# Altium PCB MAGI'sPrototypeBoard.PcbDoc (part 3 of 3)
Units mil, origin at the board's own origin, x right, y up, seen from the top; angles counter-clockwise.
Board outline 6000 x 4000 mil, 2 copper layers (Top Layer, Bottom Layer); 30 components, 124 nets, 1722 pads, 44 vias.
Unrouted connection lines stored in the file: 29.
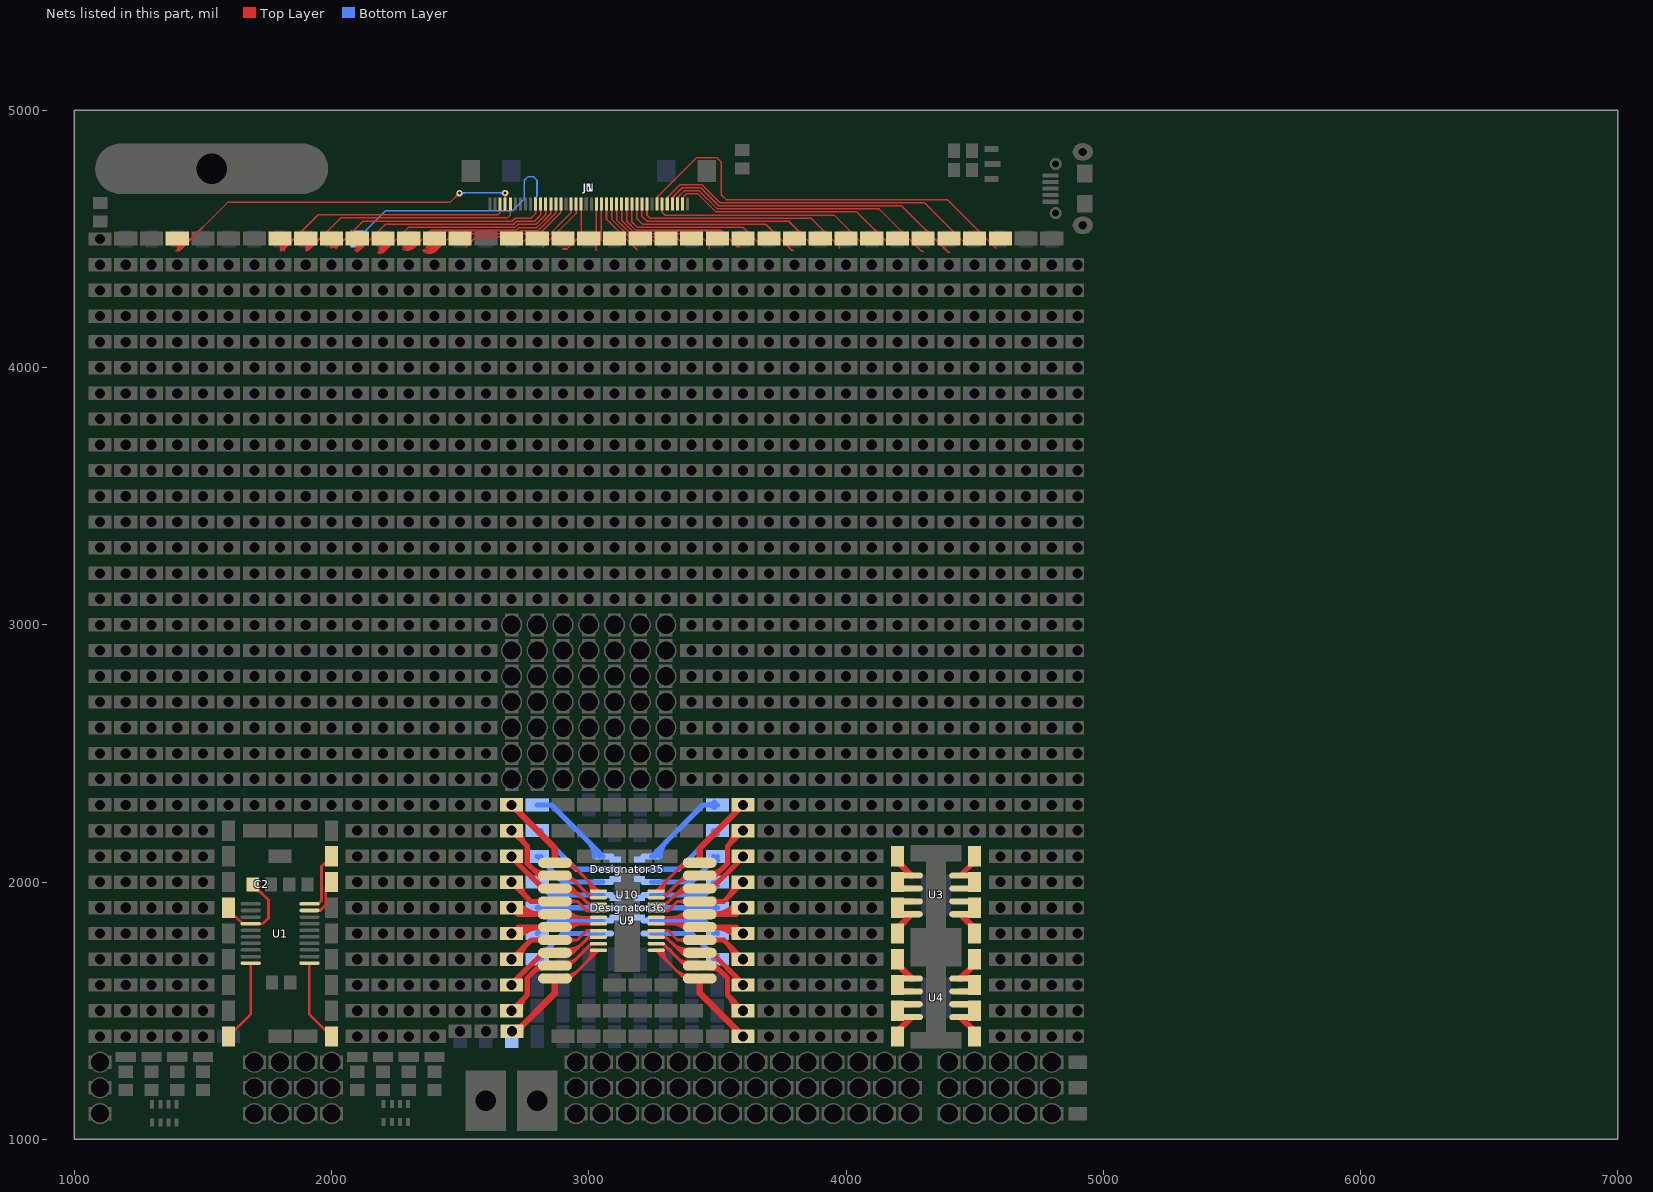
[diagram p3: the nets of this part, all layers, seen from the top]

## Via types
v1: diameter 35.43, hole 23.62, Top Layer to Bottom Layer, tented both sides, 12 vias
v2: diameter 31.5, hole 19.68, Top Layer to Bottom Layer, tented both sides, 9 vias
v3: diameter 24, hole 12, Top Layer to Bottom Layer, tented both sides, 6 vias
v4: diameter 39.37, hole 27.56, Top Layer to Bottom Layer, tented both sides, 6 vias
v5: diameter 59.06, hole 39.37, Top Layer to Bottom Layer, tented both sides, 5 vias
v6: diameter 47.24, hole 39.37, Top Layer to Bottom Layer, 3 vias
v7: diameter 47.24, hole 31.5, Top Layer to Bottom Layer, tented both sides, 3 vias

## Nets (pads, with @x,y where several pads share a name; then routed paths per layer and width w, separated by ;. In a path a pad name is that pad's centre, name@x,y a point inside that pad or via, vN(x,y) a via of type N, cw(c..) or ccw(c..) an arc to the next point about the centre after c; other vN are vias at no path point) (continued)
PA4: J1.19 pad.62@3000,4502 | length 262.3
  Top Layer w6: pad.62@3016.62,4485.38 ccw(c2985.44,4516.56) pad.62@3029.53,4516.56 ; pad.62@3020.86,4481.14 ccw(c2999.93,4502.07) pad.62@3029.53,4502.07 ; pad.62@3025.1,4476.9 ccw(c3014.42,4487.58) pad.62@3029.53,4487.58 ; 3027,4456 3029.53,4458.53 J1.19@3029.53,4636.02 ; J1.19@3027.47,4614.28 cw(c3022.51,4609.32) 3029.53,4609.32 cw(c3036.54,4609.32) J1.19@3031.58,4614.28 ; 3029.34,4472.66 ccw(c3028.9,4473.1) 3029.53,4473.1
PA5: J1.16 pad.62@3300,4502 | length 296.3
  Top Layer w6: J1.16@3086.53,4614.28 cw(c3081.57,4609.32) 3088.58,4609.32 cw(c3095.6,4609.32) J1.16@3090.64,4614.28 ; J1.16@3088.58,4636.02 3088.58,4577.53 3169.12,4497 3248.23,4497 3272.11,4473.11
PA6: J1.17 pad.62@3200,4502 | length 238.4
  Top Layer w6: J1.17@3066.84,4614.28 cw(c3061.88,4609.32) 3068.9,4609.32 cw(c3075.91,4609.32) J1.17@3070.95,4614.28 ; J1.17@3068.9,4636.02 3068.9,4577.1 3188,4458
PA7: J1.18 pad.62@3100,4502 | length 206.6
  Top Layer w6: J1.18@3047.16,4614.28 cw(c3042.2,4609.32) 3049.21,4609.32 cw(c3056.23,4609.32) J1.18@3051.27,4614.28 ; J1.18@3049.21,4636.02 3049.21,4496.01 3060.73,4484.5 pad.62@3100,4484.5
PA13: J1.27 pad.62@2400,4502 | length 1038.1
  Top Layer w6: 2355.43,4454 ccw(c2380.7,4481.21) 2406.95,4454.95 ; 2359.52,4458.4 ccw(c2384.94,4485.78) 2411.36,4459.36 ; 2363.6,4462.79 ccw(c2389.18,4490.34) 2415.76,4463.76 ; 2367.68,4467.19 ccw(c2393.42,4494.91) 2420.16,4468.16 ; 2371.76,4471.59 ccw(c2397.66,4499.48) 2424.57,4472.57 ; pad.62@2375.85,4475.98 ccw(c2401.9,4504.04) pad.62@2428.97,4476.97 ; pad.62@2379.93,4480.38 ccw(c2406.14,4508.61) pad.62@2433.37,4481.37 ; pad.62@2384.01,4484.78 ccw(c2410.38,4513.17) pad.62@2437.78,4485.78 ; 2407,4456 2407,4455 2473,4521 2722.88,4521 2734.38,4532.5 2803.59,4532.5 2872.05,4600.96 J1.27@2872.05,4636.02 ; J1.27@2869.99,4614.28 cw(c2865.03,4609.32) 2872.05,4609.32 cw(c2879.06,4609.32) J1.27@2874.1,4614.28
PA14: J1.28 pad.62@2300,4502 | length 969.4
  Top Layer w6: 2276.2,4460.89 ccw(c2294.67,4492.79) 2320.73,4466.73 ; 2279.21,4466.08 ccw(c2298.72,4499.78) 2326.25,4472.25 ; 2282.22,4471.28 ccw(c2302.77,4506.78) pad.62@2331.77,4477.77 ; pad.62@2285.22,4476.47 ccw(c2306.82,4513.77) pad.62@2337.29,4483.29 ; pad.62@2288.23,4481.66 ccw(c2310.86,4520.77) pad.62@2342.82,4488.82 ; pad.62@2291.23,4486.85 ccw(c2314.91,4527.77) 2348.34,4494.34 ; 2318,4464 2387,4533 2717.91,4533 2729.41,4544.5 2798.62,4544.5 2852.36,4598.25 J1.28@2852.36,4636.02 ; J1.28@2850.31,4614.28 cw(c2845.35,4609.32) 2852.36,4609.32 cw(c2859.38,4609.32) J1.28@2854.42,4614.28
PA15: J1.29 pad.62@2200,4502 | length 1102
  Top Layer w6: 2179.54,4446.13 ccw(c2188.18,4469.73) 2205.96,4451.96 ; 2181.61,4451.76 ccw(c2191.75,4479.46) 2212.6,4458.6 ; 2183.67,4457.4 ccw(c2195.31,4489.19) 2219.25,4465.25 ; 2185.73,4463.03 ccw(c2198.87,4498.92) 2225.89,4471.89 ; 2187.8,4468.66 ccw(c2202.43,4508.65) pad.62@2232.54,4478.54 ; 2189.86,4474.3 ccw(c2205.99,4518.37) pad.62@2239.18,4485.18 ; pad.62@2191.92,4479.93 ccw(c2209.56,4528.1) 2245.83,4491.83 ; pad.62@2193.98,4485.57 ccw(c2213.12,4537.83) 2252.48,4498.48 ; 2208,4454 2299,4545 2712.94,4545 2724.44,4556.5 2793.65,4556.5 2832.68,4595.53 J1.29@2832.68,4636.02 ; J1.29@2830.62,4614.28 cw(c2825.66,4609.32) 2832.68,4609.32 cw(c2839.69,4609.32) J1.29@2834.73,4614.28
PB0: J1.11 pad.62@3800,4502 | length 728
  Top Layer w6: J1.11@3184.95,4614.28 cw(c3179.99,4609.32) 3187.01,4609.32 cw(c3194.02,4609.32) J1.11@3189.06,4614.28 ; J1.11@3187.01,4636.02 3187.01,4578.99 3209,4557 3688.23,4557 3789.23,4456 3796,4456
PB1: J1.12 pad.62@3700,4502 | length 619.2
  Top Layer w6: J1.12@3165.27,4614.28 cw(c3160.31,4609.32) 3167.32,4609.32 cw(c3174.34,4609.32) J1.12@3169.38,4614.28 ; J1.12@3167.32,4636.02 3167.32,4566.68 3189,4545 3601,4545 pad.62@3669,4477
PB2: J1.37 pad.62@1400,4502 | length 1824.8
  Top Layer w6: 1394,4454 1408,4454 1596,4642 2461,4642 v3(2497,4678) ; 1400,4454.5 ccw(c1400,4475.02) 1414.51,4460.51 ; 1400,4460.5 ccw(c1400,4495.51) 1424.75,4470.75 ; 1400,4466.5 ccw(c1400,4515.99) pad.62@1435,4481 ; 1400,4472.5 ccw(c1400,4536.48) 1445.24,4491.24 ; pad.62@1400,4478.5 ccw(c1400,4556.96) 1455.48,4501.48 ; pad.62@1400,4484.5 ccw(c1400,4577.45) 1465.72,4511.72 ; v3@2488,4678 cw(c2466.27,4678) 2481.64,4662.64 cw(c2497,4647.27) v3@2497,4669 ; v3@2668.64,4672.64 cw(c2652.79,4656.79) J1.37@2675.2,4656.79 ; J1.37@2673.14,4657.76 ccw(c2668.18,4662.72) 2675.2,4662.72 ccw(c2682.21,4662.72) J1.37@2677.25,4657.76 ; J1.37@2675.2,4636.02 2675.2,4669.2 v3@2677,4671 ; J1.37@2675.2,4657.75 cw(c2696.25,4657.75) v3@2681.36,4672.64
  Bottom Layer w6: v3(2497,4678) 2498,4679 v3(2675,4679) ; v3@2503.36,4671.64 cw(c2521.14,4653.86) 2521.14,4679 ; v3@2503.36,4684.36 ccw(c2516.31,4697.31) 2516.31,4679 ; v3@2668.64,4672.64 ccw(c2653.27,4657.27) 2653.27,4679 ccw(c2653.27,4700.73) v3@2668.64,4685.36
PB3: J1.26 pad.62@2500,4502 | length 471.1
  Top Layer w6: 2524,4466 2524,4471 2562,4509 2727.85,4509 2739.35,4520.5 2808.56,4520.5 2891.73,4603.67 J1.26@2891.73,4636.02 ; J1.26@2889.68,4614.28 cw(c2884.72,4609.32) 2891.73,4609.32 cw(c2898.75,4609.32) J1.26@2893.79,4614.28
PB4: J1.30 pad.62@2100,4502 | length 1104
  Top Layer w6: 2090.1,4455.54 ccw(c2096.06,4483.53) 2116.3,4463.3 ; 2091.35,4461.41 ccw(c2098.81,4496.4) 2124.1,4471.1 ; 2092.6,4467.28 ccw(c2101.55,4509.27) pad.62@2131.91,4478.91 ; 2093.85,4473.15 ccw(c2104.3,4522.15) pad.62@2139.72,4486.72 ; pad.62@2095.1,4479.02 ccw(c2107.04,4535.02) 2147.53,4494.53 ; pad.62@2096.35,4484.88 ccw(c2109.78,4547.89) 2155.34,4502.34 ; 2100,4449 2116,4465 ; 2117,4464 2210,4557 2707.97,4557 2719.47,4568.5 2788.68,4568.5 2812.99,4592.82 J1.30@2812.99,4636.02 ; J1.30@2810.94,4614.28 cw(c2805.98,4609.32) 2812.99,4609.32 cw(c2820.01,4609.32) J1.30@2815.05,4614.28
PB6: J1.6 pad.62@4100,4502 | length 877.2
  Top Layer w6: J1.6@3283.38,4614.28 cw(c3278.42,4609.32) 3285.43,4609.32 cw(c3292.45,4609.32) J1.6@3287.49,4614.28 ; J1.6@3285.43,4636.02 3285.43,4602.57 3295,4593 3953,4593 pad.62@4067,4479
PB7: J1.13 pad.62@3600,4502 | length 557.2
  Top Layer w6: J1.13@3145.58,4614.28 cw(c3140.62,4609.32) 3147.64,4609.32 cw(c3154.65,4609.32) J1.13@3149.69,4614.28 ; J1.13@3147.64,4636.02 3147.64,4569.39 3184.03,4533 3513,4533 3576,4470 3586,4470
PB8: J1.2 pad.62@4200,4502 | length 909.9
  Top Layer w6: J1.2@3364.17,4636.02 3364.17,4660.56 3378.61,4675 3425,4675 3495,4605 4042,4605 pad.62@4164,4483
PB9: J1.3 pad.62@4300,4502 | length 1105.9
  Top Layer w6: J1.3@3344.49,4636.02 3344.49,4661.49 3370,4687 3429.97,4687 3499.97,4617 4128.23,4617 4292.23,4453 4301,4453 ; J1.3@3347.39,4655.71 cw(c3368.36,4655.71) 3353.54,4670.54
PB10: J1.38 pad.62@1800,4502 | length 1226.5
  Top Layer w6: 1800,4454.5 ccw(c1800,4476.88) 1815.83,4461.06 ; 1800,4460.5 ccw(c1800,4497.37) 1826.07,4471.3 ; 1800,4466.5 ccw(c1800,4517.86) pad.62@1836.31,4481.54 ; 1800,4472.5 ccw(c1800,4538.34) 1846.56,4491.78 ; pad.62@1800,4478.5 ccw(c1800,4558.83) 1856.8,4502.03 ; pad.62@1800,4484.5 ccw(c1800,4579.31) 1867.04,4512.27 ; 1817,4453 1817,4462.23 1948.77,4594 2647,4594 2655.51,4602.51 J1.38@2655.51,4636.02 ; J1.38@2653.46,4614.28 cw(c2648.5,4609.32) 2655.51,4609.32 cw(c2662.53,4609.32) J1.38@2657.57,4614.28
PB11: J1.36 pad.62@1900,4502 | length 1166.6
  Top Layer w6: 1899.56,4454.5 ccw(c1899.75,4475.62) 1914.69,4460.69 ; 1899.61,4460.5 ccw(c1899.94,4495.65) 1924.8,4470.8 ; 1899.67,4466.5 ccw(c1900.13,4515.68) pad.62@1934.9,4480.9 ; 1899.72,4472.5 ccw(c1900.31,4535.71) 1945.01,4491.01 ; pad.62@1899.78,4478.5 ccw(c1900.5,4555.74) 1955.12,4501.12 ; pad.62@1899.84,4484.5 ccw(c1900.69,4575.77) 1965.23,4511.23 ; 1905,4461 1915,4461 2036,4582 2684,4582 2694.88,4592.88 J1.36@2694.88,4636.02 ; J1.36@2692.83,4614.28 cw(c2687.87,4609.32) 2694.88,4609.32 cw(c2701.9,4609.32) J1.36@2696.94,4614.28
PB12: J1.4 pad.62@4400,4502 | length 1238.9
  Top Layer w6: J1.4@3324.8,4636.02 3324.8,4660.8 3363,4699 3434.94,4699 3504.94,4629 4216.23,4629 4397.23,4448 4404,4448 ; J1.4@3327.71,4655.71 cw(c3347.03,4655.71) 3333.37,4669.37
PB13: J1.5 pad.62@4500,4502 | length 1330.4
  Top Layer w6: J1.5@3305.12,4636.02 3305.12,4661.12 3355,4711 3439.91,4711 3509.91,4641 4305,4641 4474,4472 4474,4471 ; J1.5@3308.02,4655.71 cw(c3328.1,4655.71) 3313.9,4669.9
PB14: J1.7 pad.62@4600,4502 | length 1663.5
  Top Layer w6: J1.7@3262.65,4655.71 cw(c3271.66,4655.71) 3265.29,4662.08 ; J1.7@3263.74,4657.8 ccw(c3259.19,4662.53) 3265.75,4662.53 ; J1.7@3265.75,4636.02 3265.75,4662.53 ; J1.7@3267.76,4657.8 cw(c3272.31,4662.53) 3265.75,4662.53 ; J1.7@3268.65,4655.71 cw(c3292.14,4655.71) 3275.53,4672.32 ; 4582,4464 4582,4465 4394,4653 3534,4653 3515,4672 3515,4799.1 3497.82,4816.28 3419.5,4816.28 3265.75,4662.53
PB15: J1.9 pad.62@4000,4502 | length 858.6
  Top Layer w6: J1.9@3224.32,4614.28 cw(c3219.36,4609.32) 3226.38,4609.32 cw(c3233.39,4609.32) J1.9@3228.43,4614.28 ; J1.9@3226.38,4636.02 3226.38,4592.62 3238,4581 3864.23,4581 3974,4471.23 3974,4465
PC0: J1.24 pad.62@2700,4502 | length 298.3
  Top Layer w6: pad.62@2730,4476 2730.77,4476 2751.27,4496.5 2825.5,4496.5 2931.1,4602.1 J1.24@2931.1,4636.02 ; J1.24@2929.05,4614.28 cw(c2924.09,4609.32) 2931.1,4609.32 cw(c2938.12,4609.32) J1.24@2933.16,4614.28
PC1: J1.23 pad.62@2800,4502 | length 231.8
  Top Layer w6: 2821,4469 2950.79,4598.79 J1.23@2950.79,4636.02 ; J1.23@2948.73,4614.28 cw(c2943.77,4609.32) 2950.79,4609.32 cw(c2957.8,4609.32) J1.23@2952.84,4614.28
PC2: J1.22 pad.62@2900,4502 | length 226
  Top Layer w6: 2898,4461 2915,4461 2970.47,4516.47 J1.22@2970.47,4636.02 ; J1.22@2968.42,4614.28 cw(c2963.46,4609.32) 2970.47,4609.32 cw(c2977.49,4609.32) J1.22@2972.53,4614.28
PC3: J1.31 pad.62@2000,4502 | length 1096.2
  Top Layer w6: 1996.44,4466.68 ccw(c2000.93,4511.18) pad.62@2032.55,4479.55 ; 1997.04,4472.65 ccw(c2002.56,4527.43) pad.62@2041.5,4488.5 ; pad.62@1997.64,4478.62 ccw(c2004.2,4543.68) 2050.44,4497.44 ; pad.62@1998.25,4484.59 ccw(c2005.84,4559.93) 2059.39,4506.39 ; 2016,4464 2027,4475 2027,4474 2122,4569 2703,4569 2714.5,4580.5 2775,4580.5 2793.31,4598.81 J1.31@2793.31,4636.02 ; J1.31@2791.25,4614.28 cw(c2786.29,4609.32) 2793.31,4609.32 cw(c2800.32,4609.32) J1.31@2795.36,4614.28
PC4: J1.15 pad.62@3400,4502 | length 371.6
  Top Layer w6: J1.15@3106.21,4614.28 cw(c3101.25,4609.32) 3108.27,4609.32 cw(c3115.28,4609.32) J1.15@3110.32,4614.28 ; J1.15@3108.27,4636.02 3108.27,4574.82 3174.09,4509 3338,4509 pad.62@3368,4479
PC5: J1.10 pad.62@3900,4502 | length 768.3
  Top Layer w6: J1.10@3204.64,4614.28 cw(c3199.68,4609.32) 3206.69,4609.32 cw(c3213.71,4609.32) J1.10@3208.75,4614.28 ; J1.10@3206.69,4636.02 3206.69,4588.81 3226.5,4569 3777,4569 pad.62@3870,4476
PC7: J1.14 pad.62@3500,4502 | length 471.4
  Top Layer w6: J1.14@3125.9,4614.28 cw(c3120.94,4609.32) 3127.95,4609.32 cw(c3134.97,4609.32) J1.14@3130.01,4614.28 ; J1.14@3127.95,4636.02 3127.95,4572.11 3179.06,4521 3425,4521 3469,4477 3469,4461
RST: C2.2 JN.2 pad.34 pad.62@2100,4500 U1.4 | length 1548.3
  Top Layer w6: pad.34@1600,1894.85 pad.34@1600,1900
  Top Layer w10: pad.34@1600,1894.85 1600,1892.02 1653.64,1838.39 U1.4@1685.83,1838.39 1733.39,1838.39 1755,1860 1755,1929.65 C2.2@1693.7,1990.94 ; C2.2@1693.7,1968.39 cw(c1693.7,1913.92) 1732.21,1952.43 ; C2.2@1693.7,1978.39 cw(c1693.7,1948.07) C2.2@1715.14,1969.51 ; C2.2@1712.32,1987.01 ccw(c1747.78,1987.01) 1722.71,1961.94
  Bottom Layer w6: pad.62@2100,4500 2210.5,4610.5 2704.5,4610.5 2749.25,4655.25 2749.25,4728.25 2763.75,4742.75 2784.25,4742.75 2798.75,4728.25 2798.75,4666.75 ; pad.62@2100,4511 ccw(c2100,4537.56) 2118.78,4518.78 ccw(c2137.56,4500) pad.62@2111,4500 ; pad.62@2100,4517 ccw(c2100,4558.04) 2129.02,4529.02 ccw(c2158.04,4500) pad.62@2117,4500 ; pad.62@2123,4500 cw(c2178.53,4500) 2139.26,4539.26 ; JN.2@2793.31,4636.02 2793.31,4661.31 2798.75,4666.75 ; JN.2@2796.1,4656.51 cw(c2806.11,4659.38) 2798.75,4666.75
SCK: pad.47 U1.11 | length 358.3
  Top Layer w10: U1.11@1914.17,1684.84 1914.17,1485.83 pad.47@2000,1400 ; 1965.86,1434.14 ccw(c2000,1468.28) pad.47@2000,1420
SS: pad.39 U1.10 | length 320.4
  Top Layer w10: pad.39@1600,1400 1685.83,1485.83 U1.10@1685.83,1684.84
SWCLK: pad.40@2000,2100 U1.20 | length 284.7
  Top Layer w10: U1.20@1914.17,1915.16 1948.16,1915.16 1961,1928 1961,2061 pad.40@2000,2100 ; U1.20@1946.65,1917.05 ccw(c1946.65,1925.24) 1952.45,1919.45 ; 1965.86,2065.86 cw(c2000,2031.72) pad.40@2000,2080
SWDIO: pad.41 U1.19 | length 193.2
  Top Layer w10: U1.19@1914.17,1889.57 1956.57,1889.57 1977,1910 1977,1977 pad.41@2000,2000 ; U1.19@1946.65,1891.46 ccw(c1946.65,1919.95) 1966.8,1899.8
U3-1: pad.59 U3.1 | length 98
  Top Layer w25: pad.59@4200,2100 4200,2080.51 U3.1@4255.51,2025
U3-2: pad.58 U3.2 | length 65.9
  Top Layer w25: pad.58@4200,2000 4225,1975 U3.2@4255.51,1975
U3-3: pad.57 U3.3 | length 65.9
  Top Layer w25: pad.57@4200,1900 4225,1925 U3.3@4255.51,1925
U3-4: pad.56 U3.4 | length 98
  Top Layer w25: pad.56@4200,1800 4200,1819.49 U3.4@4255.51,1875
U3-5: pad.63@4500,1800 U3.5 | length 98
  Top Layer w25: U3.5@4444.49,1875 4500,1819.49 pad.63@4500,1800
U3-6: pad.62@4500,1900 U3.6 | length 93.3
  Top Layer w20: U3.6@4444.49,1925 U3.6@4475,1925 ; pad.62@4499.74,1915 cw(c4499.16,1949.16) pad.62@4475,1925 ; pad.62@4500,1900 U3.6@4475,1925
U3-7: pad.61 U3.7 | length 93.3
  Top Layer w20: U3.7@4444.49,1975 pad.61@4475,1975 ; pad.61@4499.74,1985 ccw(c4499.16,1950.85) pad.61@4475,1975 ; pad.61@4500,2000 pad.61@4475,1975
U3-8: pad.60 U3.8 | length 125.5
  Top Layer w20: U3.8@4444.49,2025 4500,2080.51 pad.60@4500,2100 ; pad.60@4494.76,2075.27 ccw(c4470.02,2100) pad.60@4505,2100
U4-1: pad.55 U4.1 | length 78.5
  Top Layer w25: pad.55@4200,1680.51 U4.1@4255.51,1625
U4-2: pad.54 U4.2 | length 65.9
  Top Layer w25: pad.54@4200,1600 4225,1575 U4.2@4255.51,1575
U4-3: pad.53 U4.3 | length 65.9
  Top Layer w25: pad.53@4200,1500 4225,1525 U4.3@4255.51,1525
U4-4: pad.52 U4.4 | length 98
  Top Layer w25: pad.52@4200,1400 4200,1419.49 U4.4@4255.51,1475
U4-5: pad.51 U4.5 | length 78.5
  Top Layer w25: U4.5@4444.49,1475 pad.51@4500,1419.49
U4-6: pad.50 U4.6 | length 89.6
  Top Layer w25: U4.6@4444.49,1525 4475,1525 pad.50@4500,1500 ; pad.50@4478.66,1521.34 ccw(c4500,1542.67) pad.50@4500,1512.5
U4-7: pad.49 U4.7 | length 89.6
  Top Layer w25: U4.7@4444.49,1575 4475,1575 pad.49@4500,1600 ; pad.49@4478.66,1578.66 cw(c4500,1557.32) pad.49@4500,1587.5
U4-8: pad.48 U4.8 | length 98
  Top Layer w25: U4.8@4444.49,1625 4500,1680.51 pad.48@4500,1700
U7-1: Designator35.3 pad.64@2700,2300 pad.73@2800,2300 U7.1 U9.1 U10.14 | length 1103.5
  Top Layer w12: U7.1@2868.5,2075 2927.95,2075 U9.1@3037.8,1965.16 ; U7.1@2914.76,2061.32 cw(c2914.76,1996.44) 2960.64,2042.31 ; U7.1@2914.76,2073.32 cw(c2914.76,2037.41) 2940.16,2062.8 ; 2990.91,2012.04 cw(c2944.03,1965.16) U9.1@3010.33,1965.16 ; 3011.4,1991.56 cw(c2985,1965.16) U9.1@3022.33,1965.16 ; U9.1@3031.88,1971.07 cw(c3025.97,1965.16) U9.1@3034.33,1965.16
  Top Layer w25: pad.64@2700,2300 2868.5,2131.5 U7.1@2868.5,2075
  Bottom Layer w20: pad.73@2800,2300 2855.51,2300 U10.14@3055.51,2100 ; 2998.65,2156.86 cw(c2941.79,2100) U10.14@3022.2,2100 ; 3032.8,2122.72 cw(c3010.08,2100) U10.14@3042.2,2100
U7-2: Designator35.2 pad.64@2700,2200 pad.74@2800,2200 U7.2 U9.2 U10.13 | length 1036.5
  Top Layer w12: U7.2@2868.5,2025 2924.66,2025 3010.1,1939.57 U9.2@3037.8,1939.57 ; U7.2@2914.76,2011.32 cw(c2914.76,1954.38) 2955.03,1994.64 ; U7.2@2914.76,2023.32 cw(c2914.76,1995.35) 2934.54,2015.12
  Top Layer w20: pad.64@2700,2200 2761,2139 2761,2072.55 2808.55,2025 U7.2@2868.5,2025 ; pad.64@2715,2200 ccw(c2751.21,2200) pad.64@2725.61,2174.39 ; pad.64@2735,2200 ccw(c2819.5,2200) 2759.75,2140.25 ; 2782.33,2051.22 ccw(c2822.24,2091.13) U7.2@2822.24,2034.69
  Bottom Layer w20: pad.74@2800,2200 2950,2050 U10.13@3055.51,2050 ; pad.74@2815,2200 ccw(c2851.21,2200) 2825.61,2174.39
U7-3: Designator35.1 pad.64@2700,2100 pad.75@2800,2100 U7.3 U9.3 U10.12 | length 979.3
  Top Layer w12: U7.3@2868.5,1975 2939,1975 ; U7.3@2914.76,1961.32 cw(c2914.76,1869.77) 2979.5,1934.5 ; U7.3@2914.76,1973.32 cw(c2914.76,1910.74) 2959.01,1954.99 ; U7.3@2914.76,1985.32 cw(c2914.76,1951.71) 2938.53,1975.47 ; U7.3@2926.48,1967.93 cw(c2939,1960.38) 2939,1975 ; U7.3@2926.48,1982.07 ccw(c2939,1989.62) 2939,1975 ; 2990.59,1923.41 ccw(c3011.22,1944.05) U9.3@3011.22,1914.87 ; U9.3@3037.8,1913.98 3000.02,1913.98 2939,1975
  Top Layer w20: pad.64@2700,2100 2700,2096.78 2821.78,1975 U7.3@2868.5,1975 ; 2804.92,1991.86 ccw(c2822.24,2009.19) U7.3@2822.24,1984.69 ; 2806.04,1990.74 cw(c2790.3,1975) U7.3@2812.56,1975
  Bottom Layer w20: pad.75@2800,2100 2900,2000 U10.12@3055.51,2000 ; pad.75@2815,2100 ccw(c2851.21,2100) 2825.61,2074.39
U7-4: Designator36.3 pad.64@2700,2000 pad.76@2800,2000 U7.4 U9.4 U10.11 | length 843.7
  Top Layer w12: U7.4@2868.5,1925 2955,1925 2991.61,1888.39 U9.4@3037.8,1888.39 ; U7.4@2924.44,1915.32 cw(c2947.8,1891.96) 2947.8,1925 cw(c2947.8,1958.04) U7.4@2924.44,1934.68
  Top Layer w20: pad.64@2700,2000 2775,1925 U7.4@2868.5,1925 ; pad.64@2715,2000 ccw(c2751.21,2000) pad.64@2725.61,1974.39 ; pad.64@2735,2000 ccw(c2819.5,2000) 2759.75,1940.25 ; U7.4@2815.4,1918.15 ccw(c2798.86,1901.62) 2798.86,1925 ccw(c2798.86,1948.38) U7.4@2815.4,1931.85
  Bottom Layer w20: pad.76@2800,2000 2850,1950 U10.11@3055.51,1950
U7-5: Designator36.2 pad.64@2700,1900 pad.77@2800,1900 U7.5 U9.5 U10.10 | length 896.9
  Top Layer w12: U7.5@2868.5,1875 2880.71,1862.8 U9.5@3037.8,1862.8 ; U7.5@2915.96,1876.19 ccw(c2948.3,1908.53) 2948.3,1862.8 ; U7.5@2924.44,1884.68 ccw(c2977.27,1937.5) 2977.27,1862.8
  Top Layer w20: pad.64@2700,1900 2725,1875 U7.5@2868.5,1875 ; pad.64@2716.17,1897.17 ccw(c2769.7,1950.7) 2769.7,1875 ; pad.64@2730.31,1911.31 ccw(c2817.98,1998.98) U7.5@2817.98,1875 ; U7.5@2815.4,1868.15 ccw(c2798.86,1851.62) 2798.86,1875 ccw(c2798.86,1898.38) U7.5@2815.4,1881.85
  Bottom Layer w20: pad.77@2800,1900 U10.10@3055.51,1900
U7-6: Designator36.1 pad.64@2700,1800 pad.78@2800,1800 U7.6 U9.6 U10.9 | length 865
  Top Layer w12: U7.6@2880.71,1837.2 U9.6@3037.8,1837.2 ; U7.6@2915.96,1823.81 cw(c2948.3,1791.47) 2948.3,1837.2 ; U7.6@2924.44,1815.32 cw(c2977.27,1762.5) 2977.27,1837.2
  Top Layer w20: pad.64@2716.17,1802.83 cw(c2769.7,1749.3) 2769.7,1825 ; pad.64@2725,1825 U7.6@2868.5,1825 ; pad.64@2730.31,1788.69 cw(c2817.98,1701.02) U7.6@2817.98,1825 ; U7.6@2815.4,1818.15 ccw(c2798.86,1801.62) 2798.86,1825 ccw(c2798.86,1848.38) U7.6@2815.4,1831.85
  Bottom Layer w20: pad.78@2800,1800 2850,1850 U10.9@3055.51,1850
U7-7: pad.64@2700,1700 pad.79@2800,1700 U7.7 U9.7 U10.8 | length 892.8
  Top Layer w12: U7.7@2868.5,1775 2955,1775 2991.61,1811.61 U9.7@3037.8,1811.61 ; U7.7@2924.44,1765.32 cw(c2947.8,1741.96) 2947.8,1775 cw(c2947.8,1808.04) U7.7@2924.44,1784.68
  Top Layer w20: pad.64@2700,1700 2775,1775 U7.7@2868.5,1775 ; pad.64@2715,1700 cw(c2751.21,1700) pad.64@2725.61,1725.61 ; pad.64@2735,1700 cw(c2819.5,1700) 2759.75,1759.75 ; U7.7@2815.4,1768.15 ccw(c2798.86,1751.62) 2798.86,1775 ccw(c2798.86,1798.38) U7.7@2815.4,1781.85
  Bottom Layer w20: pad.79@2800,1700 2900,1800 U10.8@3055.51,1800 ; pad.79@2815,1700 cw(c2851.21,1700) 2825.61,1725.61
U7-8: pad.64@2700,1600 U7.8 U9.8 | length 603.9
  Top Layer w12: U7.8@2868.5,1725 2939,1725 ; U7.8@2914.76,1714.69 ccw(c2914.76,1748.29) 2938.53,1724.53 ; U7.8@2914.76,1726.69 ccw(c2914.76,1789.26) 2959.01,1745.01 ; U7.8@2914.76,1738.69 ccw(c2914.76,1830.23) 2979.5,1765.5 ; U7.8@2926.48,1717.93 cw(c2939,1710.38) 2939,1725 ; U7.8@2926.48,1732.07 ccw(c2939,1739.62) 2939,1725 ; 2990.59,1776.59 cw(c3011.22,1755.95) U9.8@3011.22,1785.13 ; U9.8@3037.8,1786.02 3000.02,1786.02 2939,1725
  Top Layer w20: pad.64@2700,1603.22 U7.8@2821.78,1725 ; 2804.92,1708.14 cw(c2822.24,1690.81) U7.8@2822.24,1715.32 ; 2806.04,1709.26 ccw(c2790.3,1725) U7.8@2812.56,1725
U7-9: pad.64@2700,1500 U7.9 U9.9 | length 634.3
  Top Layer w12: U7.9@2914.76,1676.69 ccw(c2914.76,1704.65) 2934.54,1684.88 ; U7.9@2914.76,1688.69 ccw(c2914.76,1745.62) 2955.03,1705.36 ; U7.9@2924.66,1675 3010.1,1760.43 U9.9@3037.8,1760.43
  Top Layer w20: pad.64@2700,1500 2761,1561 2761,1627.45 2808.55,1675 U7.9@2868.5,1675 ; pad.64@2715,1500 cw(c2751.21,1500) pad.64@2725.61,1525.61 ; pad.64@2735,1500 cw(c2819.5,1500) 2759.75,1559.75 ; 2782.33,1648.78 cw(c2822.24,1608.87) U7.9@2822.24,1665.32
U7-10: pad.64@2701,1420 pad.118@2700,1400 U7.10 U9.10 | length 643
  Top Layer w12: U7.10@2914.76,1626.69 ccw(c2914.76,1662.59) 2940.16,1637.2 ; U7.10@2914.76,1638.69 ccw(c2914.76,1703.56) 2960.64,1657.69 ; U7.10@2927.95,1625 U9.10@3037.8,1734.84 ; 2990.91,1687.96 ccw(c2944.03,1734.84) U9.10@3010.33,1734.84 ; 3011.4,1708.44 ccw(c2985,1734.84) U9.10@3022.33,1734.84 ; U9.10@3031.88,1728.93 ccw(c3025.97,1734.84) U9.10@3034.33,1734.84
  Top Layer w25: pad.64@2718,1418 2868.5,1568.5 U7.10@2868.5,1625 ; pad.64@2720,1433.5 ccw(c2720,1466.09) 2743.05,1443.05 ccw(c2766.09,1420) pad.64@2733.5,1420
U7-11: pad.75@3600,1400 U7.11 U9.11 | length 617.3
  Top Layer w12: U9.11@3262.2,1734.84 U7.11@3372.05,1625 ; U9.11@3265.67,1734.84 ccw(c3274.03,1734.84) U9.11@3268.12,1728.93 ; U9.11@3277.67,1734.84 ccw(c3315,1734.84) 3288.6,1708.44 ; U9.11@3289.67,1734.84 ccw(c3355.97,1734.84) 3309.09,1687.96 ; 3339.36,1657.69 ccw(c3385.24,1703.56) U7.11@3385.24,1638.69 ; 3359.85,1637.2 ccw(c3385.24,1662.59) U7.11@3385.24,1626.69
  Top Layer w25: U7.11@3431.5,1625 3431.5,1568.5 pad.75@3600,1400
U7-12: pad.74@3600,1500 U7.12 U9.12 | length 634.3
  Top Layer w12: U9.12@3262.2,1760.43 3289.9,1760.43 U7.12@3375.34,1675 ; 3344.97,1705.36 ccw(c3385.24,1745.62) U7.12@3385.24,1688.69 ; 3365.46,1684.88 ccw(c3385.24,1704.65) U7.12@3385.24,1676.69
  Top Layer w20: U7.12@3431.5,1675 3491.45,1675 3539,1627.45 3539,1561 pad.74@3600,1500 ; U7.12@3477.76,1665.32 cw(c3477.76,1608.87) 3517.67,1648.78 ; 3540.25,1559.75 cw(c3480.5,1500) pad.74@3565,1500 ; pad.74@3574.39,1525.61 cw(c3548.78,1500) pad.74@3585,1500
U7-13: pad.73@3600,1600 U7.13 U9.13 | length 603.9
  Top Layer w12: U9.13@3262.2,1786.02 3299.98,1786.02 3361,1725 ; U9.13@3288.78,1785.13 cw(c3288.78,1755.95) 3309.41,1776.59 ; 3320.5,1765.5 ccw(c3385.24,1830.23) U7.13@3385.24,1738.69 ; 3340.99,1745.01 ccw(c3385.24,1789.26) U7.13@3385.24,1726.69 ; 3361.47,1724.53 ccw(c3385.24,1748.29) U7.13@3385.24,1714.69 ; U7.13@3373.52,1717.93 ccw(c3361,1710.39) 3361,1725 ; U7.13@3373.52,1732.07 cw(c3361,1739.62) 3361,1725 ; U7.13@3431.5,1725 3361,1725
  Top Layer w20: U7.13@3477.76,1715.32 cw(c3477.76,1690.81) 3495.09,1708.14 ; U7.13@3478.22,1725 pad.73@3600,1603.22 ; U7.13@3487.44,1725 ccw(c3509.7,1725) 3493.96,1709.26
U7-14: pad.72@3600,1700 pad.80 U7.14 U9.14 U10.7 | length 921.3
  Top Layer w12: U9.14@3262.2,1811.61 3308.39,1811.61 3345,1775 U7.14@3431.5,1775 ; U7.14@3375.56,1765.32 ccw(c3352.2,1741.96) 3352.2,1775 ccw(c3352.2,1808.04) U7.14@3375.56,1784.68
  Top Layer w20: U7.14@3431.5,1775 3525,1775 pad.72@3600,1700 ; U7.14@3484.6,1768.15 cw(c3501.14,1751.62) 3501.14,1775 cw(c3501.14,1798.38) U7.14@3484.6,1781.85 ; 3540.25,1759.75 cw(c3480.5,1700) pad.72@3565,1700 ; pad.72@3574.39,1725.61 cw(c3548.78,1700) pad.72@3585,1700
  Bottom Layer w20: U10.7@3244.49,1800 3400,1800 pad.80@3500,1700 ; pad.80@3485,1700 ccw(c3448.79,1700) 3474.39,1725.61 ccw(c3500,1751.21) pad.80@3500,1715
U7-15: Designator36.6 pad.70@3600,1800 pad.81 U7.15 U9.15 U10.6 | length 921.9
  Top Layer w12: U9.15@3262.2,1837.2 U7.15@3419.29,1837.2 ; 3322.73,1837.2 cw(c3322.73,1762.5) U7.15@3375.56,1815.32 ; 3351.7,1837.2 cw(c3351.7,1791.47) U7.15@3384.04,1823.81
  Top Layer w20: U7.15@3431.5,1825 pad.70@3575,1825 ; U7.15@3482.02,1825 cw(c3482.02,1701.02) pad.70@3569.69,1788.69 ; U7.15@3484.6,1818.15 cw(c3501.14,1801.62) 3501.14,1825 cw(c3501.14,1848.38) U7.15@3484.6,1831.85 ; 3530.3,1825 cw(c3530.3,1749.3) pad.70@3583.83,1802.83
  Bottom Layer w20: U10.6@3244.49,1850 3450,1850 pad.81@3500,1800 ; pad.81@3485,1800 ccw(c3448.79,1800) 3474.39,1825.61 ccw(c3500,1851.21) pad.81@3500,1815
U7-16: Designator36.5 pad.69@3600,1900 pad.82 U7.16 U9.16 U10.5 | length 901.1
  Top Layer w12: U9.16@3262.2,1862.8 U7.16@3419.29,1862.8 ; 3322.73,1862.8 ccw(c3322.73,1937.5) U7.16@3375.56,1884.68 ; 3351.7,1862.8 ccw(c3351.7,1908.53) U7.16@3384.04,1876.19
  Top Layer w20: U7.16@3431.5,1875 pad.69@3575,1875 ; U7.16@3482.02,1875 ccw(c3482.02,1998.98) pad.69@3569.69,1911.31 ; U7.16@3484.6,1868.15 cw(c3501.14,1851.62) 3501.14,1875 cw(c3501.14,1898.38) U7.16@3484.6,1881.85 ; 3530.3,1875 ccw(c3530.3,1950.7) pad.69@3583.83,1897.17
  Bottom Layer w20: U10.5@3244.49,1900 pad.82@3500,1900 ; pad.82@3489.39,1889.39 ccw(c3463.79,1863.79) 3463.79,1900 ccw(c3463.79,1936.21) pad.82@3489.39,1910.61
U7-17: Designator36.4 pad.68@3600,2000 pad.83 U7.17 U9.17 U10.4 | length 900.6
  Top Layer w12: U9.17@3262.2,1888.39 3308.39,1888.39 3345,1925 U7.17@3431.5,1925 ; U7.17@3375.56,1915.32 ccw(c3352.2,1891.96) 3352.2,1925 ccw(c3352.2,1958.04) U7.17@3375.56,1934.68
  Top Layer w20: U7.17@3431.5,1925 3525,1925 pad.68@3600,2000 ; U7.17@3484.6,1918.15 cw(c3501.14,1901.62) 3501.14,1925 cw(c3501.14,1948.38) U7.17@3484.6,1931.85 ; 3540.25,1940.25 ccw(c3480.5,2000) pad.68@3565,2000 ; pad.68@3574.39,1974.39 ccw(c3548.79,2000) pad.68@3585,2000
  Bottom Layer w20: U10.4@3244.49,1950 3450,1950 pad.83@3500,2000 ; pad.83@3485,2000 cw(c3448.79,2000) 3474.39,1974.39 cw(c3500,1948.79) pad.83@3500,1985
U7-18: Designator35.6 pad.67@3600,2100 pad.84 U7.18 U9.18 U10.3 | length 957.8
  Top Layer w12: U9.18@3262.2,1913.98 3299.98,1913.98 3361,1975 ; U9.18@3288.78,1914.87 ccw(c3288.78,1944.05) 3309.41,1923.41 ; 3320.5,1934.5 cw(c3385.24,1869.77) U7.18@3385.24,1961.32 ; 3340.99,1954.99 cw(c3385.24,1910.74) U7.18@3385.24,1973.32 ; 3361.47,1975.47 cw(c3385.24,1951.71) U7.18@3385.24,1985.32 ; U7.18@3373.52,1967.93 ccw(c3361,1960.38) 3361,1975 ; U7.18@3373.52,1982.07 cw(c3361,1989.62) 3361,1975 ; U7.18@3431.5,1975 3361,1975
  Top Layer w20: U7.18@3477.76,1984.69 ccw(c3477.76,2009.19) 3495.09,1991.86 ; U7.18@3478.22,1975 pad.67@3600,2096.78 ; U7.18@3487.44,1975 cw(c3509.7,1975) 3493.96,1990.74
  Bottom Layer w20: U10.3@3244.49,2000 3400,2000 pad.84@3500,2100 ; pad.84@3485,2100 cw(c3448.79,2100) 3474.39,2074.39 cw(c3500,2048.79) pad.84@3500,2085
U7-19: Designator35.5 pad.66@3600,2200 pad.85 U7.19 U9.19 U10.2 | length 1008.8
  Top Layer w12: U9.19@3262.2,1939.57 3289.9,1939.57 U7.19@3375.34,2025 ; 3344.97,1994.64 cw(c3385.24,1954.38) U7.19@3385.24,2011.32 ; 3365.46,2015.12 cw(c3385.24,1995.35) U7.19@3385.24,2023.32
  Top Layer w20: U7.19@3431.5,2025 3491.45,2025 3539,2072.55 3539,2139 pad.66@3600,2200 ; U7.19@3477.76,2034.69 ccw(c3477.76,2091.13) 3517.67,2051.22 ; 3540.25,2140.25 ccw(c3480.5,2200) pad.66@3565,2200 ; pad.66@3574.39,2174.39 ccw(c3548.79,2200) pad.66@3585,2200
  Bottom Layer w20: U10.2@3244.49,2050 3350,2050 pad.85@3500,2200 ; pad.85@3485,2200 cw(c3448.79,2200) 3474.39,2174.39 cw(c3500,2148.79) pad.85@3500,2185
U7-20: Designator35.4 pad.65@3600,2300 pad.86 U7.20 U9.20 U10.1 | length 1100.9
  Top Layer w12: U9.20@3262.2,1965.16 U7.20@3372.05,2075 ; U9.20@3265.67,1965.16 cw(c3274.03,1965.16) U9.20@3268.12,1971.07 ; U9.20@3277.67,1965.16 cw(c3315,1965.16) 3288.6,1991.56 ; U9.20@3289.67,1965.16 cw(c3355.97,1965.16) 3309.09,2012.04 ; 3339.36,2042.31 cw(c3385.24,1996.44) U7.20@3385.24,2061.32 ; 3359.84,2062.8 cw(c3385.24,2037.41) U7.20@3385.24,2073.32
  Top Layer w25: U7.20@3431.5,2075 3431.5,2131.5 pad.65@3600,2300
  Bottom Layer w20: U10.1@3244.49,2100 3444.49,2300 pad.86@3500,2300 ; U10.1@3257.8,2100 cw(c3289.92,2100) 3267.2,2122.72 ; U10.1@3277.8,2100 cw(c3358.21,2100) 3301.35,2156.86 ; pad.86@3489.39,2289.39 ccw(c3463.79,2263.79) 3463.79,2300 ccw(c3463.79,2336.21) pad.86@3489.39,2310.61
pads on no net: J6.1 J6.2
copper on no net:
  other v5: 3100,1400 3200,1400 3100,2300 3200,2300

## Polygon pours and split planes (outlines as drawn)
GND on Top Layer "Keep-Out Layer-No Net" (solid, pour order 12): 2300,4900 2300,4500 3700,4500 3700,4900
GND on Bottom Layer "Keep-Out Layer-No Net" (solid, remove dead copper, pour order 14): 2300,4900 2300,4500 3700,4500 3700,4900

## Keep-outs
Keep-Out Layer:
  lines w10: 1044,1000 3000,1000 4973,1000 4973,2973 4973,4900 3000,4900 1044,4900 1044,2956 1044,1000

## Other copper
Top Layer:
  text "MAGI" at 2060,4790 h31.5
  text "PrototypeBoard" at 2060,4730 h31.5
Bottom Layer:
  rectangle net GND: 4154,1361 4545,2141
  rectangle net GND: 1600,1400 2000,2200

## Silkscreen, mask and mechanical layers (free items; w line width, h text height)
Top Overlay:
  text "PB0" at 3746,4545 h39.37
  text "PB2" at 1350,4544 h39.37
  text "PA2" at 1544,4544 h39.37
  text "PB10" at 1730,4544 h39.37
  text "PC3" at 1949,4544 h39.37
  text "PA15" at 2137,4544 h39.37
  text "PA13" at 2334,4544 h39.37
  text "PA0" at 2547,4544 h39.37
  text "PC1" at 2754,4544 h39.37
  text "PA4" at 2946,4544 h39.37
  text "PC4" at 3347,4544 h39.37
  text "PB7" at 3549,4544 h39.37
  text "PB15" at 3930,4544 h39.37
  text "PB8" at 4145,4544 h39.37
  text "PB12" at 4338,4544 h39.37
  text "PB14" at 4542,4544 h39.37
  text "PA6" at 3148,4543 h39.37
  text "BOOT0" at 1215,4495 h39.37
  text "PA3" at 1449,4495 h39.37
  text "PA1" at 1654,4495 h39.37
  text "PB11" at 1839,4495 h39.37
  text "PB4" at 2050,4495 h39.37
  text "PA14" at 2229,4495 h39.37
  text "PB3" at 2449,4495 h39.37
  text "PC0" at 2648,4495 h39.37
  text "PC2" at 2848,4495 h39.37
  text "PA7" at 3049,4495 h39.37
  text "PA5" at 3249,4495 h39.37
  text "PC7" at 3451,4495 h39.37
  text "PB1" at 3656,4495 h39.37
  text "PC5" at 3850,4495 h39.37
  text "PB6" at 4051,4495 h39.37
  text "PB9" at 4252,4495 h39.37
  text "PB13" at 4431,4495 h39.37
  text "NRST" at 4629,4495 h39.37
  text "GND" at 1055,4435 h31.5
  text "GND" at 1055,4435 h31.5
  text "5V" at 4865,4435 h31.5
  text "GND" at 1055,4335 h31.5
  text "3.3V" at 4840,4335 h31.5
  text "GND" at 1055,4235 h31.5
  text "5V" at 4865,4235 h31.5
  text "GND" at 1055,4135 h31.5
  text "3.3V" at 4840,4135 h31.5
  text "GND" at 1055,4035 h31.5
  text "5V" at 4865,4035 h31.5
  text "GND" at 1055,3935 h31.5
  text "3.3V" at 4840,3935 h31.5
  text "GND" at 1055,3835 h31.5
  text "5V" at 4865,3835 h31.5
  text "GND" at 1055,3735 h31.5
  text "3.3V" at 4840,3735 h31.5
  text "GND" at 1055,3635 h31.5
  text "5V" at 4865,3635 h31.5
  text "GND" at 1055,3535 h31.5
  text "3.3V" at 4840,3535 h31.5
  text "GND" at 1055,3435 h31.5
  text "5V" at 4865,3435 h31.5
  text "GND" at 1055,3335 h31.5
  text "3.3V" at 4840,3335 h31.5
  text "GND" at 1055,3235 h31.5
  text "5V" at 4865,3235 h31.5
  text "GND" at 1055,3135 h31.5
  text "3.3V" at 4840,3135 h31.5
  text "GND" at 1055,3035 h31.5
  text "5V" at 4865,3035 h31.5
  text "GND" at 1055,2935 h31.5
  text "3.3V" at 4840,2935 h31.5
  text "GND" at 1055,2835 h31.5
  text "5V" at 4865,2835 h31.5
  text "GND" at 1055,2735 h31.5
  text "3.3V" at 4840,2735 h31.5
  text "GND" at 1055,2635 h31.5
  text "5V" at 4865,2635 h31.5
  text "GND" at 1055,2535 h31.5
  text "3.3V" at 4840,2535 h31.5
  text "GND" at 1055,2435 h31.5
  text "5V" at 4865,2435 h31.5
  text "GND" at 1055,2335 h31.5
  text "3.3V" at 4840,2335 h31.5
  text "BT0" at 1609,2237 h31.5 r270
  text "GND" at 1055,2235 h31.5
  text "5V" at 4865,2235 h31.5
  text "3V3" at 1988,2156 h31.5 r90
  text "PF0" at 1609,2137 h31.5 r270
  text "STM32F0" at 1691,2137 h31.5
  text "GND" at 1055,2135 h31.5
  text "3.3V" at 4840,2135 h31.5
  text "CLK" at 1856,2084 h31.5
  text "A14" at 1988,2061 h31.5 r90
  text "GND" at 1055,2035 h31.5
  text "5V" at 4865,2035 h31.5
  text "OSC" at 1659.08,2032 h31.5
  text "SWDIO" at 1800,2031 h31.5
  text "PF1" at 1609,2030 h31.5 r270
  text "A13" at 1988,1962 h31.5 r90
  text "RST" at 1609,1937 h31.5 r270
  text "GND" at 1055,1935 h31.5
  text "3.3V" at 4840,1935 h31.5
  text "A10" at 1988,1858 h31.5 r90
  text "PA0" at 1609,1842 h31.5 r270
  text "GND" at 1055,1835 h31.5
  text "5V" at 4865,1835 h31.5
  text "PA9" at 1988,1758 h31.5 r90
  text "PA1" at 1609,1736 h31.5 r270
  text "GND" at 1055,1735 h31.5
  text "3.3V" at 4840,1735 h31.5
  text "PB1" at 1988,1664.5 h31.5 r90
  text "PA2" at 1609,1641 h31.5 r270
  text "GND" at 1055,1635 h31.5
  text "5V" at 4865,1635 h31.5
  text "PA7" at 1988,1560 h31.5 r90
  text "PA3" at 1609,1541 h31.5 r270
  text "GND" at 1055,1535 h31.5
  text "3.3V" at 4840,1535 h31.5
  text "PA6" at 1988,1458 h31.5 r90
  text "PA4" at 1609,1442 h31.5 r270
  text "GND" at 1055,1435 h31.5
  text "5V" at 4865,1435 h31.5
  text "PA5" at 1988,1358 h31.5 r90
  text "3.3V" at 4840,1335 h31.5
  text "5V" at 4865,1235 h31.5
  text "3.3V" at 4840,1135 h31.5
Bottom Overlay:
  text "D13" at 2744,4540.94 h35.43
  text "D12" at 2848,4540.94 h35.43
  text "D11" at 2937,4541 h35.43
  text "D10" at 3043,4540.94 h35.43
  text "RST" at 2150,4537 h39.37
  text "A5" at 2231,4537 h39.37
  text "A3" at 2329,4537 h39.37
  text "A2" at 2429,4537 h39.37
  text "A1" at 2526,4537 h39.37
  text "A0" at 2633,4537 h39.37
  text "D9" at 3127,4537 h39.37
  text "D8" at 3228,4537 h39.37
  text "D7" at 3325,4537 h39.37
  text "D6" at 3426,4537 h39.37
  text "D5" at 3527,4537 h39.37
  text "D4" at 3632,4537 h39.37
  text "D3" at 3732,4537 h39.37
  text "D2" at 3827,4537 h39.37
  text "D1" at 3921,4537 h39.37
  text "D0" at 4030,4537 h39.37
  text "BT0" at 1706,2183 h31.5
  text "3V3" at 1980,2180 h31.5
  text "A14" at 1980,2085 h31.5
  text "PF0" at 1706,2083 h31.5
  text "A13" at 1980,1986 h31.5
  text "PF1" at 1706,1976 h31.5
  text "RST" at 1706,1883 h31.5
  text "A10" at 1980,1882 h31.5
  text "PA0" at 1706,1788 h31.5
  text "PA9" at 1980,1782 h31.5
  text "PB1" at 1980,1688.5 h31.5
  text "PA1" at 1706,1682 h31.5
  text "PA2" at 1706,1587 h31.5
  text "PA7" at 1980,1584 h31.5
  text "PA3" at 1706,1487 h31.5
  text "PA6" at 1980,1482 h31.5
  text "GND" at 1718,1387 h31.5
  text "PA5" at 1980,1382 h31.5

## Text inside footprints (layer, text, board x,y; h text height)
R3: Mechanical 1 "R1" at 1335.62,1088.01 h21.65